# EAGLE board i2c_stm32 (EAGLE 9.6.2)

Size 160 x 100 mm. Coordinates in mm from the lower left corner, seen from the top.
Outline: 0,0 160,0 160,100 0,100 0,0
Copper layers (1*16): Top 0.035mm / dielectric 1.5mm / Bottom 0.035mm
Design rules "default": minimum track width 6mil, minimum drill 0.35mm, track to track 6mil, track to pad 6mil, pad to pad 6mil, via to via 6mil, smd to smd 6mil, copper to edge 40mil, drill to drill 6mil, minimum pad ring 10mil, minimum via ring 8mil, stop-mask expansion 4mil, vias tented up to drill 0mil, thermal gap 10mil

## Footprints (pad centres in the part's own frame; a part is rotated, then mirrored left to right if it is on the bottom)
CAP_0603 = smd 0.92 x 0.93: 1 -0.705,0; 2 0.705,0
LED-0603 = smd 1 x 1: A -0.877,0; C 0.877,0
1X04 = drill 1.016 pad 1.88: 1 0,0; 2 2.54,0; 3 5.08,0; 4 7.62,0
1X20 = drill 1.016 pad 1.88: 1 0,0; 2 2.54,0; 3 5.08,0; 4 7.62,0; 5 10.16,0; 6 12.7,0; 7 15.24,0; 8 17.78,0; 9 20.32,0; 10 22.86,0; 11 25.4,0; 12 27.94,0; 13 30.48,0; 14 33.02,0; 15 35.56,0; 16 38.1,0; 17 40.64,0; 18 43.18,0; 19 45.72,0; 20 48.26,0
USB-B-MICRO-SMD = smd 1.45 x 0.4: D+ 2.725,0; D- 2.725,0.65; GND 2.725,-1.3; ID 2.725,-0.65; VBUS 2.725,1.3 | smd 1.5 x 1.8: SHIELD1 0,3.685; SHIELD2 0,-3.685 | smd 1.5 x 2.5: SHIELD3 0,0 | hole 0.85: 2.2,1.9; 2.2,-1.9
RESC0603_M = smd 1.25 x 1: 1 -0.9,0; 2 0.9,0
RES_0603 = smd 0.74 x 0.93: 1 -0.795,0; 2 0.795,0
TACTILE_SWITCH_PTH_6.0MM = drill 1.016 pad 1.88: 1 -3.251,2.261; 2 3.251,2.261; 3 -3.251,-2.261; 4 3.251,-2.261
QFP50P900X900X160-48N = smd 1.56 x 0.28: 1 -4.18,2.75; 2 -4.18,2.25; 3 -4.18,1.75; 4 -4.18,1.25; 5 -4.18,0.75; 6 -4.18,0.25; 7 -4.18,-0.25; 8 -4.18,-0.75; 9 -4.18,-1.25; 10 -4.18,-1.75; 11 -4.18,-2.25; 12 -4.18,-2.75; 25 4.18,-2.75; 26 4.18,-2.25; 27 4.18,-1.75; 28 4.18,-1.25; 29 4.18,-0.75; 30 4.18,-0.25; 31 4.18,0.25; 32 4.18,0.75; 33 4.18,1.25; 34 4.18,1.75; 35 4.18,2.25; 36 4.18,2.75 | smd 0.28 x 1.56: 13 -2.75,-4.18; 14 -2.25,-4.18; 15 -1.75,-4.18; 16 -1.25,-4.18; 17 -0.75,-4.18; 18 -0.25,-4.18; 19 0.25,-4.18; 20 0.75,-4.18; 21 1.25,-4.18; 22 1.75,-4.18; 23 2.25,-4.18; 24 2.75,-4.18; 37 2.75,4.18; 38 2.25,4.18; 39 1.75,4.18; 40 1.25,4.18; 41 0.75,4.18; 42 0.25,4.18; 43 -0.25,4.18; 44 -0.75,4.18; 45 -1.25,4.18; 46 -1.75,4.18; 47 -2.25,4.18; 48 -2.75,4.18
24-VFQFN = smd 0.26 x 0.69: 1 -1.25,-1.92; 2 -0.75,-1.92; 3 -0.25,-1.92; 4 0.25,-1.92; 5 0.75,-1.92; 6 1.25,-1.92; 13 1.25,1.92; 14 0.75,1.92; 15 0.25,1.92; 16 -0.25,1.92; 17 -0.75,1.92; 18 -1.25,1.92 | smd 0.69 x 0.26: 7 1.92,-1.25; 8 1.92,-0.75; 9 1.92,-0.25; 10 1.92,0.25; 11 1.92,0.75; 12 1.92,1.25; 19 -1.92,1.25; 20 -1.92,0.75; 21 -1.92,0.25; 22 -1.92,-0.25; 23 -1.92,-0.75; 24 -1.92,-1.25 | smd 2.7 x 2.6: 25 0,0
QFN50P400X400X95-21N = smd 0.81 x 0.26: 1 -1.95,1; 2 -1.95,0.5; 3 -1.95,0; 4 -1.95,-0.5; 5 -1.95,-1; 11 1.95,-1; 12 1.95,-0.5; 13 1.95,0; 14 1.95,0.5; 15 1.95,1 | smd 0.26 x 0.81: 6 -1,-1.95; 7 -0.5,-1.95; 8 0,-1.95; 9 0.5,-1.95; 10 1,-1.95; 16 1,1.95; 17 0.5,1.95; 18 0,1.95; 19 -0.5,1.95; 20 -1,1.95 | smd 2.6 x 2.6: 21 0,0
SOT23-5 = smd 0.55 x 1.2: 1 -0.95,-1.3; 2 0,-1.3; 3 0.95,-1.3; 4 0.95,1.3; 5 -0.95,1.3
PQFN50P200X200X80-10N = smd 0.35 x 0.38: 1 -0.765,0.25; 2 -0.765,-0.25; 3 -0.5,-0.765; 4 0,-0.765; 5 0.5,-0.765; 6 0.765,-0.25; 7 0.765,0.25; 8 0.5,0.765; 9 0,0.765; 10 -0.5,0.765
ANT-2.4GHZ-6.5X2.2MM = smd 1.016 x 2.54: FEED -3.302,0; NC 3.302,0
CRYSTAL-SMD-5X3.2-4PAD = smd 1.9 x 1.1: 1 -1.85,-1.15; 2 1.85,-1.15; 3 1.85,1.15; 4 -1.85,1.15
CRYSTAL-SMD-3.2X1.5MM = smd 1 x 1.8: P$1 -1.25,0; P$2 1.25,0

## Placement (x,y rotation side)
C3  100nF  [CAP_0603]  -38.1,40.64 0 top  (outside the outline)
C4  0.01uF  [CAP_0603]  -41.91,40.64 0 top  (outside the outline)
C5  100 nF  [CAP_0603]  -45.72,40.64 0 top  (outside the outline)
C6  2.2nF  [CAP_0603]  -26.67,40.64 0 top  (outside the outline)
C7  18pF  [CAP_0603]  -49.53,40.64 0 top  (outside the outline)
C8  18pF  [CAP_0603]  -53.34,40.64 0 top  (outside the outline)
C9  1.5pF  [CAP_0603]  -57.15,40.64 0 top  (outside the outline)
C10  1pF  [CAP_0603]  -15.24,44.45 0 top  (outside the outline)
C11  4.7 pF  [CAP_0603]  -19.05,44.45 0 top  (outside the outline)
C12  2.2nF  [CAP_0603]  -22.86,44.45 0 top  (outside the outline)
C13  33 nF  [CAP_0603]  -26.67,44.45 0 top  (outside the outline)
C14  100 nF  [CAP_0603]  -67.31,-21.59 0 top  (outside the outline)
C15  100 nF  [CAP_0603]  -67.31,-25.4 0 top  (outside the outline)
C16  15pF  [CAP_0603]  -30.48,44.45 0 top  (outside the outline)
C17  15pF  [CAP_0603]  -34.29,44.45 0 top  (outside the outline)
C18  100nF  [CAP_0603]  -38.1,44.45 0 top  (outside the outline)
C19  100nF  [CAP_0603]  -41.91,44.45 0 top  (outside the outline)
C20  100nF  [CAP_0603]  -45.72,44.45 0 top  (outside the outline)
C21  100nF  [CAP_0603]  -49.53,44.45 0 top  (outside the outline)
C22  1uF  [CAP_0603]  -53.34,44.45 0 top  (outside the outline)
C24  22nF  [CAP_0603]  -57.15,44.45 0 top  (outside the outline)
C25  100nF  [CAP_0603]  -15.24,48.26 0 top  (outside the outline)
C26  1uF  [CAP_0603]  -19.05,48.26 0 top  (outside the outline)
C27  100nF  [CAP_0603]  -22.86,48.26 0 top  (outside the outline)
C28  10uF  [CAP_0603]  -26.67,48.26 0 top  (outside the outline)
C29  100nF  [CAP_0603]  -30.48,48.26 0 top  (outside the outline)
C30  10pF  [CAP_0603]  -34.29,48.26 0 top  (outside the outline)
C31  10pF  [CAP_0603]  -38.1,48.26 0 top  (outside the outline)
D1  [LED-0603]  -15.24,50.8 0 top  (outside the outline)
D2  [LED-0603]  -19.05,50.8 0 top  (outside the outline)
J2  [1X04]  -22.86,39.37 0 top  (outside the outline)
J3  [1X20]  -63.5,31.75 0 top  (outside the outline)
J4  [1X20]  -63.5,35.56 0 top  (outside the outline)
J5  [USB-B-MICRO-SMD]  -33.02,5.08 0 top  (outside the outline)
L1  2.7 nH  [RESC0603_M]  -27.94,19.05 0 top  (outside the outline)
L2  8.2 nH  [RESC0603_M]  -35.56,19.05 0 top  (outside the outline)
L3  3.9 nH  [RESC0603_M]  -43.18,19.05 0 top  (outside the outline)
R1  220  [RES_0603]  -41.91,48.26 0 top  (outside the outline)
R2  22k  [RES_0603]  -45.72,48.26 0 top  (outside the outline)
R3  1M  [RES_0603]  -49.53,48.26 0 top  (outside the outline)
R4  1M  [RES_0603]  -63.5,-2.54 0 top  (outside the outline)
R5  10k  [RES_0603]  -53.34,48.26 0 top  (outside the outline)
R6  220  [RES_0603]  -57.15,48.26 0 top  (outside the outline)
R7  4.7k  [RES_0603]  -63.5,-6.35 0 top  (outside the outline)
R8  4.7k  [RES_0603]  -63.5,-10.16 0 top  (outside the outline)
R9  4.7k  [RES_0603]  -63.5,-13.97 0 top  (outside the outline)
R10  4.7k  [RES_0603]  -63.5,-17.78 0 top  (outside the outline)
S1  [TACTILE_SWITCH_PTH_6.0MM]  -17.78,19.05 0 top  (outside the outline)
U1  STM32F103C8T6  [QFP50P900X900X160-48N]  -22.86,7.62 0 top  (outside the outline)
U2  MPU-6050  [24-VFQFN]  -54.61,5.08 0 top  (outside the outline)
U4  NRF24L01  [QFN50P400X400X95-21N]  -45.72,6.35 0 top  (outside the outline)
U5  RT9193-33GB  [SOT23-5]  -22.86,25.4 0 top  (outside the outline)
U6  BMP388  [PQFN50P200X200X80-10N]  -67.31,-16.51 0 top  (outside the outline)
U$4  2.45GHz  [ANT-2.4GHZ-6.5X2.2MM]  -29.21,26.67 0 top  (outside the outline)
Y1  8MHz  [CRYSTAL-SMD-5X3.2-4PAD]  -54.61,17.78 0 top  (outside the outline)
Y3  16MHz  [CRYSTAL-SMD-5X3.2-4PAD]  -16.51,26.67 0 top  (outside the outline)
Y4  32.768kHz  [CRYSTAL-SMD-3.2X1.5MM]  -35.56,25.4 0 top  (outside the outline)

## Library data of the parts
C3-C22 C24-C31 = Resistor_Capacitor; CREATED_BY: PCBLayout.com; DIGIKEY_PART_NUMBER: 399-7814-2-ND; MANUFACTURER: KEMET; MPN: C0603C100C5GACTU; PACKAGE: SMD 0603
D1 D2 = SparkFun-LED
J2 = SparkFun-Connectors; PROD_ID: CONN-09696
J3 J4 = SparkFun-Connectors
J5 = SparkFun-Connectors; PROD_ID: CONN-11752
L1-L3 = Nordic_nRF
R1-R10 = Resistor_Capacitor; CREATED_BY: PCBLayout.com; DIGIKEY_PART_NUMBER: 311-0.0GRTR-ND; MANUFACTURER: Yageo; MPN: RC0603JR-070RL; PACKAGE: SMD 0603
S1 = SparkFun-Switches; PROD_ID: SWCH-08441; SF_SKU: COM-00097
U1 = STM32F103C8T6; AVAILABILITY: Warning; DESCRIPTION: ARM® Cortex®-M3 STM32F1 Microcontroller IC 32-Bit 72MHz 64KB (64K x 8) FLASH 48-LQFP (7x7); MF: STMicroelectronics; MP: STM32F103C8T6; PACKAGE: LQFP-48 STMicroelectronics; PRICE: None; PURCHASE-URL: https://pricing.snapeda.com/search/part/STM32F103C8T6/?ref=eda; SPICEPREFIX: X
U2 = Sensor; CREATED_BY: PCBLayout.com; DIGIKEY_PART_NUMBER: 1428-1007-1-ND; MANUFACTURER: TDK InvenSense; MPN: MPU-6050; PACKAGE: 24-VFQFN
U4 = NRF24L01; AVAILABILITY: Warning; DESCRIPTION: IC RF TxRx Only General ISM > 1GHZ 2.4GHz 20-VFQFN Exposed Pad; MF: Nordic; MP: NRF24L01; PACKAGE: VFQFN-20 Nordic Semiconductor; PRICE: None; PURCHASE-URL: https://pricing.snapeda.com/search/part/NRF24L01/?ref=eda
U5 = SparkFun-IC-Power; PROD_ID: VREG-12594
U6 = BMP388; DESCRIPTION: Pressure Sensor 4.35PSI ~ 18.13PSI (30kPa ~ 125kPa) Absolute 10-WFLGA; DIGI-KEY_PART_NUMBER: 828-1079-1-ND; MF: Bosch Sensortec; MP: BMP388; PACKAGE: WFLGA-10 Bosch Tools; PURCHASE-URL: https://pricing.snapeda.com/search/part/BMP388/?ref=eda
U$4 = SparkFun-RF; PROD_ID: ANT-08187; SF_ID: WRL-00144
Y1 = SparkFun-Clocks; PROD_ID: XTAL-09431
Y3 = SparkFun-Clocks; PROD_ID: XTAL-08218; SF_ID: COM-00094
Y4 = SparkFun-Clocks; PROD_ID: XTAL-13062

## Nets
5V: C25.2 C26.2 J4.3 J5.VBUS U5.1 U5.3
ANT1: L1.1 L2.1 U4.12
ANT2: L2.2 L3.1 U4.13
EP: U2.25 U4.21
GND: C3.2 C4.2 C5.2 C6.2 C7.2 C8.2 C10.1 C11.1 C12.1 C13.2 C14.2 C15.1 C16.2 C17.2 C18.2 C19.2 C20.2 C21.2 C22.2 C24.1 C27.2 C28.2 C29.2 C30.2 C31.2 D1.C D2.C J2.1 J3.19 J3.20 J4.2 J5.GND J5.ID J5.SHIELD1 J5.SHIELD2 J5.SHIELD3 R2.2 S1.3 U1.8 U1.23 U1.35 U1.44 U1.47 U2.1 U2.9 U2.11 U2.18 U4.8 U4.14 U4.17 U4.20 U6.3 U6.5 U6.8 U6.9
N$1: C4.1 U2.8
N$2: C3.1 U2.10
N$3: C6.1 U2.20
N$4: D1.A R6.2
N$5: C24.2 U5.4
N$6: D2.A R1.2
N$7: C8.1 R4.2 U4.9 Y3.1
N$8: C7.1 R4.1 U4.10 Y3.3
N$9: R2.1 U4.16
N$12: C9.2 C10.2 U$4.FEED
N$13: C9.1 L3.2
N$14: C25.1 C26.1 U5.2
N$17: C13.1 U4.19
OSC32_IN: C30.1 U1.3 Y4.P$1
OSC32_OUT: C31.1 U1.4 Y4.P$2
OSC_IN: C16.1 R3.2 U1.5 Y1.1
OSC_OUT: C17.1 R3.1 U1.6 Y1.3
PA0: J3.5 U1.10
PA1: J3.6 U1.11 U2.12
PA2: J3.7 U1.12
PA3: J3.8 U1.13
PA4: J3.9 U1.14 U4.1
PA5: J3.10 U1.15 U4.3
PA6: J3.11 U1.16 U4.5
PA7: J3.12 U1.17 U4.4
PA8: J4.16 U1.29
PA9: J4.15 U1.30
PA10: J4.14 U1.31
PA11: J4.13 U1.32
PA12: J4.12 J4.20 U1.33
PA13: J4.19
PA14: J4.18
PA15: J4.11 U1.38
PB0: J3.13 U1.18 U4.2
PB1: J3.14 U1.19 U4.6
PB2: U1.20
PB3: J4.10 U1.39
PB4: J4.9 U1.40
PB5: J4.8 U1.41
PB6: J4.7 R7.1 U1.42 U6.2
PB7: J4.6 R8.1 U1.43 U6.4
PB8: J4.5 U1.45
PB9: J4.4 U1.46 U6.7
PB10: J3.15 R9.1 U1.21 U2.23
PB11: J3.16 R10.1 U1.22 U2.24
PB12: U1.25
PB13: U1.26
PB14: U1.27
PB15: J4.17 U1.28
PC13: J3.2 R1.1 U1.2
PC14: J3.3
PC15: J3.4
RESET: C22.1 J3.17 R5.1 S1.1 U1.7
SWCLK: J2.2 U1.37
SWDIO: J2.3 U1.34
VBAT: J3.1 U1.1
VDD: C5.1 C14.1 C15.2 C18.1 C19.1 C20.1 C21.1 C27.1 C28.1 C29.1 J2.4 J3.18 J4.1 R5.2 R6.1 R7.2 R8.2 R9.2 R10.2 U1.9 U1.24 U1.36 U1.48 U2.13 U4.7 U4.15 U4.18 U5.5 U6.1 U6.6 U6.10
VDD_PA: C11.2 C12.2 L1.2 U4.11

## Tracks (layer width: path | path; a pad name or v marks a point on that pad's centre or on a via)
5V  (5 unrouted)
ANT1  (2 unrouted)
ANT2  (2 unrouted)
EP  (1 unrouted)
GND  (54 unrouted)
N$1  (1 unrouted)
N$2  (1 unrouted)
N$3  (1 unrouted)
N$4  (1 unrouted)
N$5  (1 unrouted)
N$6  (1 unrouted)
N$7  (3 unrouted)
N$8  (3 unrouted)
N$9  (1 unrouted)
N$12  (2 unrouted)
N$13  (1 unrouted)
N$14  (2 unrouted)
N$17  (1 unrouted)
OSC32_IN  (2 unrouted)
OSC32_OUT  (2 unrouted)
OSC_IN  (3 unrouted)
OSC_OUT  (3 unrouted)
PA0  (1 unrouted)
PA1  (2 unrouted)
PA2  (1 unrouted)
PA3  (1 unrouted)
PA4  (2 unrouted)
PA5  (2 unrouted)
PA6  (2 unrouted)
PA7  (2 unrouted)
PA8  (1 unrouted)
PA9  (1 unrouted)
PA10  (1 unrouted)
PA11  (1 unrouted)
PA12  (2 unrouted)
PA15  (1 unrouted)
PB0  (2 unrouted)
PB1  (2 unrouted)
PB3  (1 unrouted)
PB4  (1 unrouted)
PB5  (1 unrouted)
PB6  (3 unrouted)
PB7  (3 unrouted)
PB8  (1 unrouted)
PB9  (2 unrouted)
PB10  (3 unrouted)
PB11  (3 unrouted)
PB15  (1 unrouted)
PC13  (2 unrouted)
RESET  (4 unrouted)
SWCLK  (1 unrouted)
SWDIO  (1 unrouted)
VBAT  (1 unrouted)
VDD  (30 unrouted)
VDD_PA  (3 unrouted)